# Altium PCB air_pod_case.PcbDoc
Units mm, origin at the board's own origin, x right, y up, seen from the top; angles counter-clockwise.
Board outline 166.05 x 139.83 mm, 2 copper layers (Top Layer, Bottom Layer); 9 components, 96 nets, 204 pads, 144 vias.
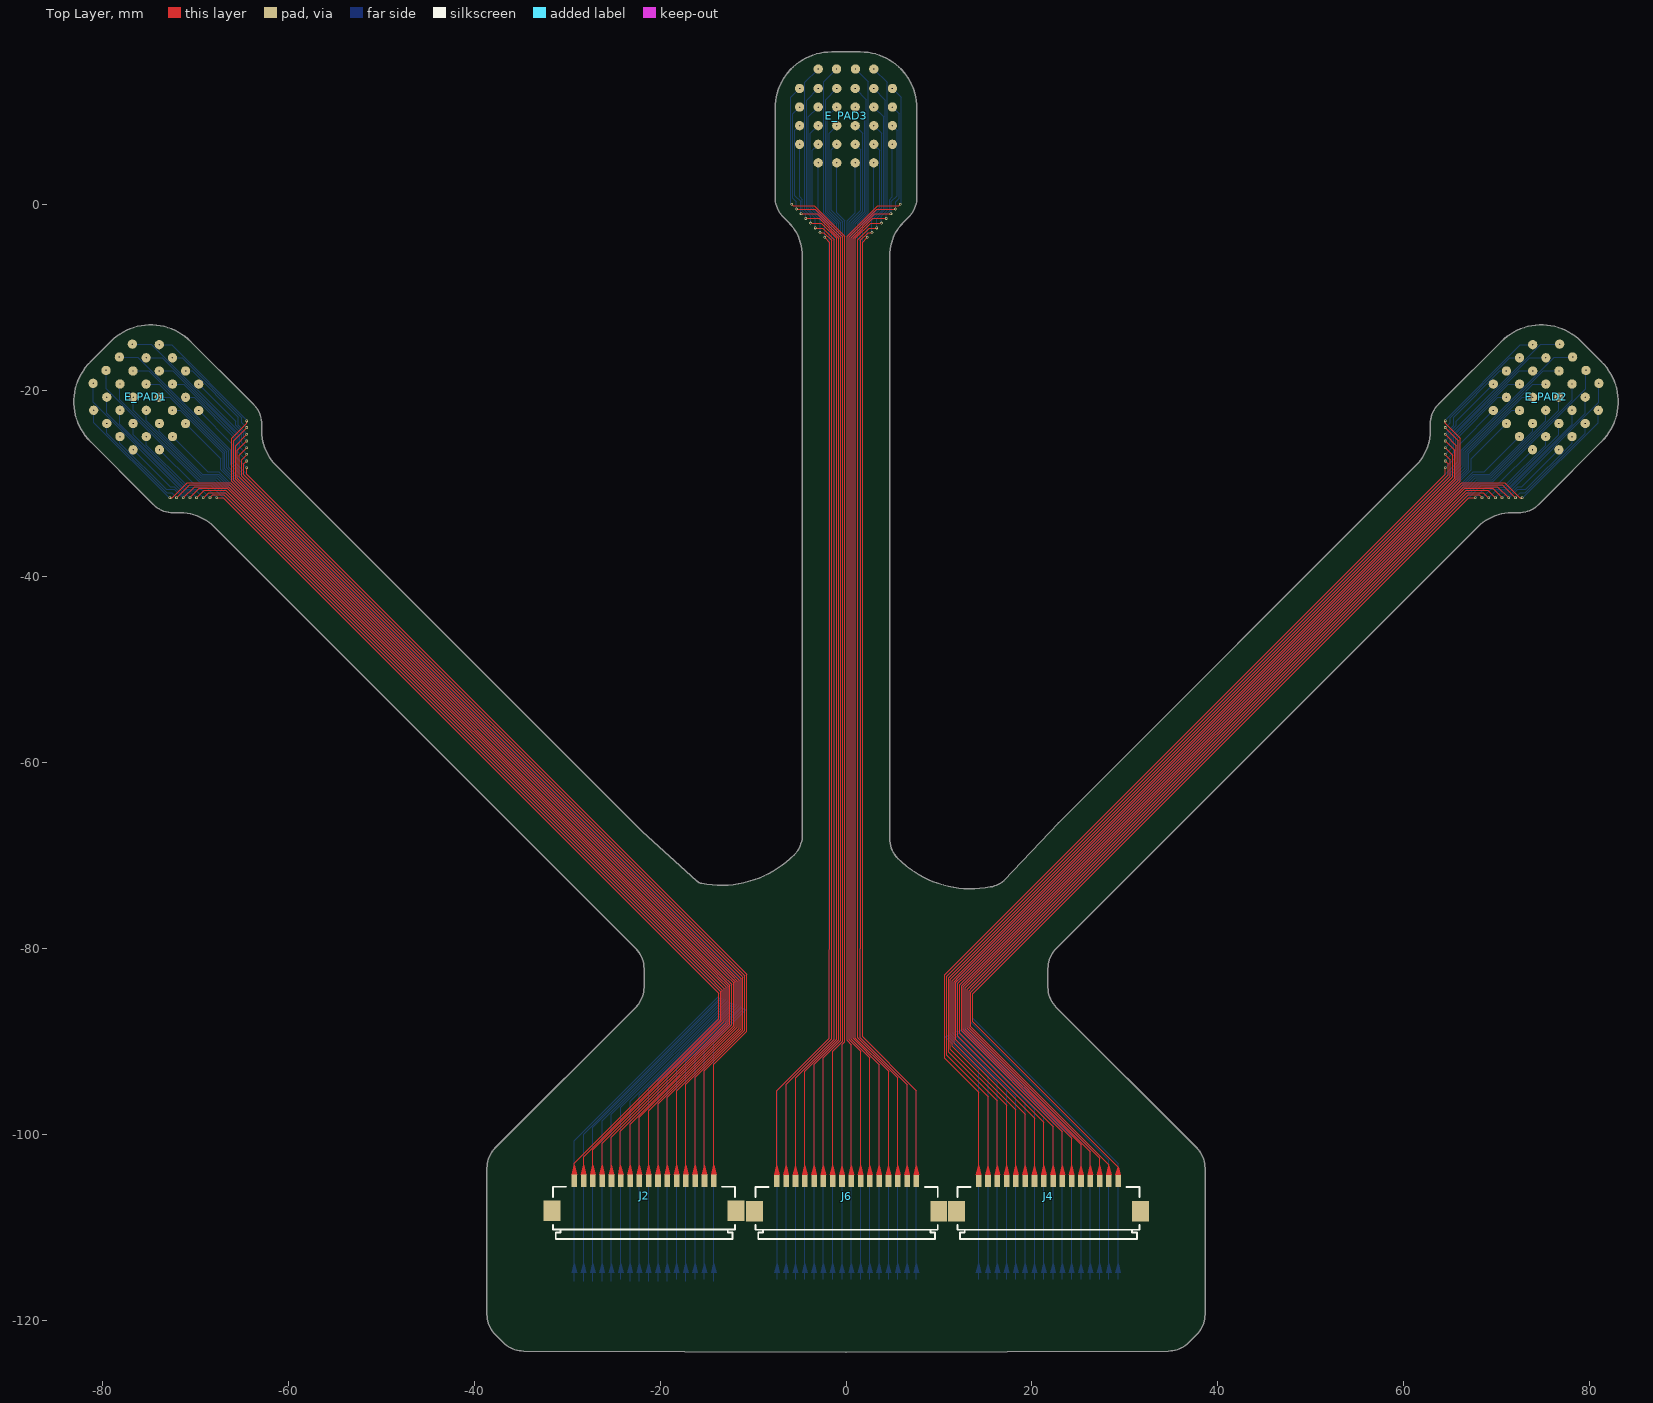
[diagram p0: Top Layer view]
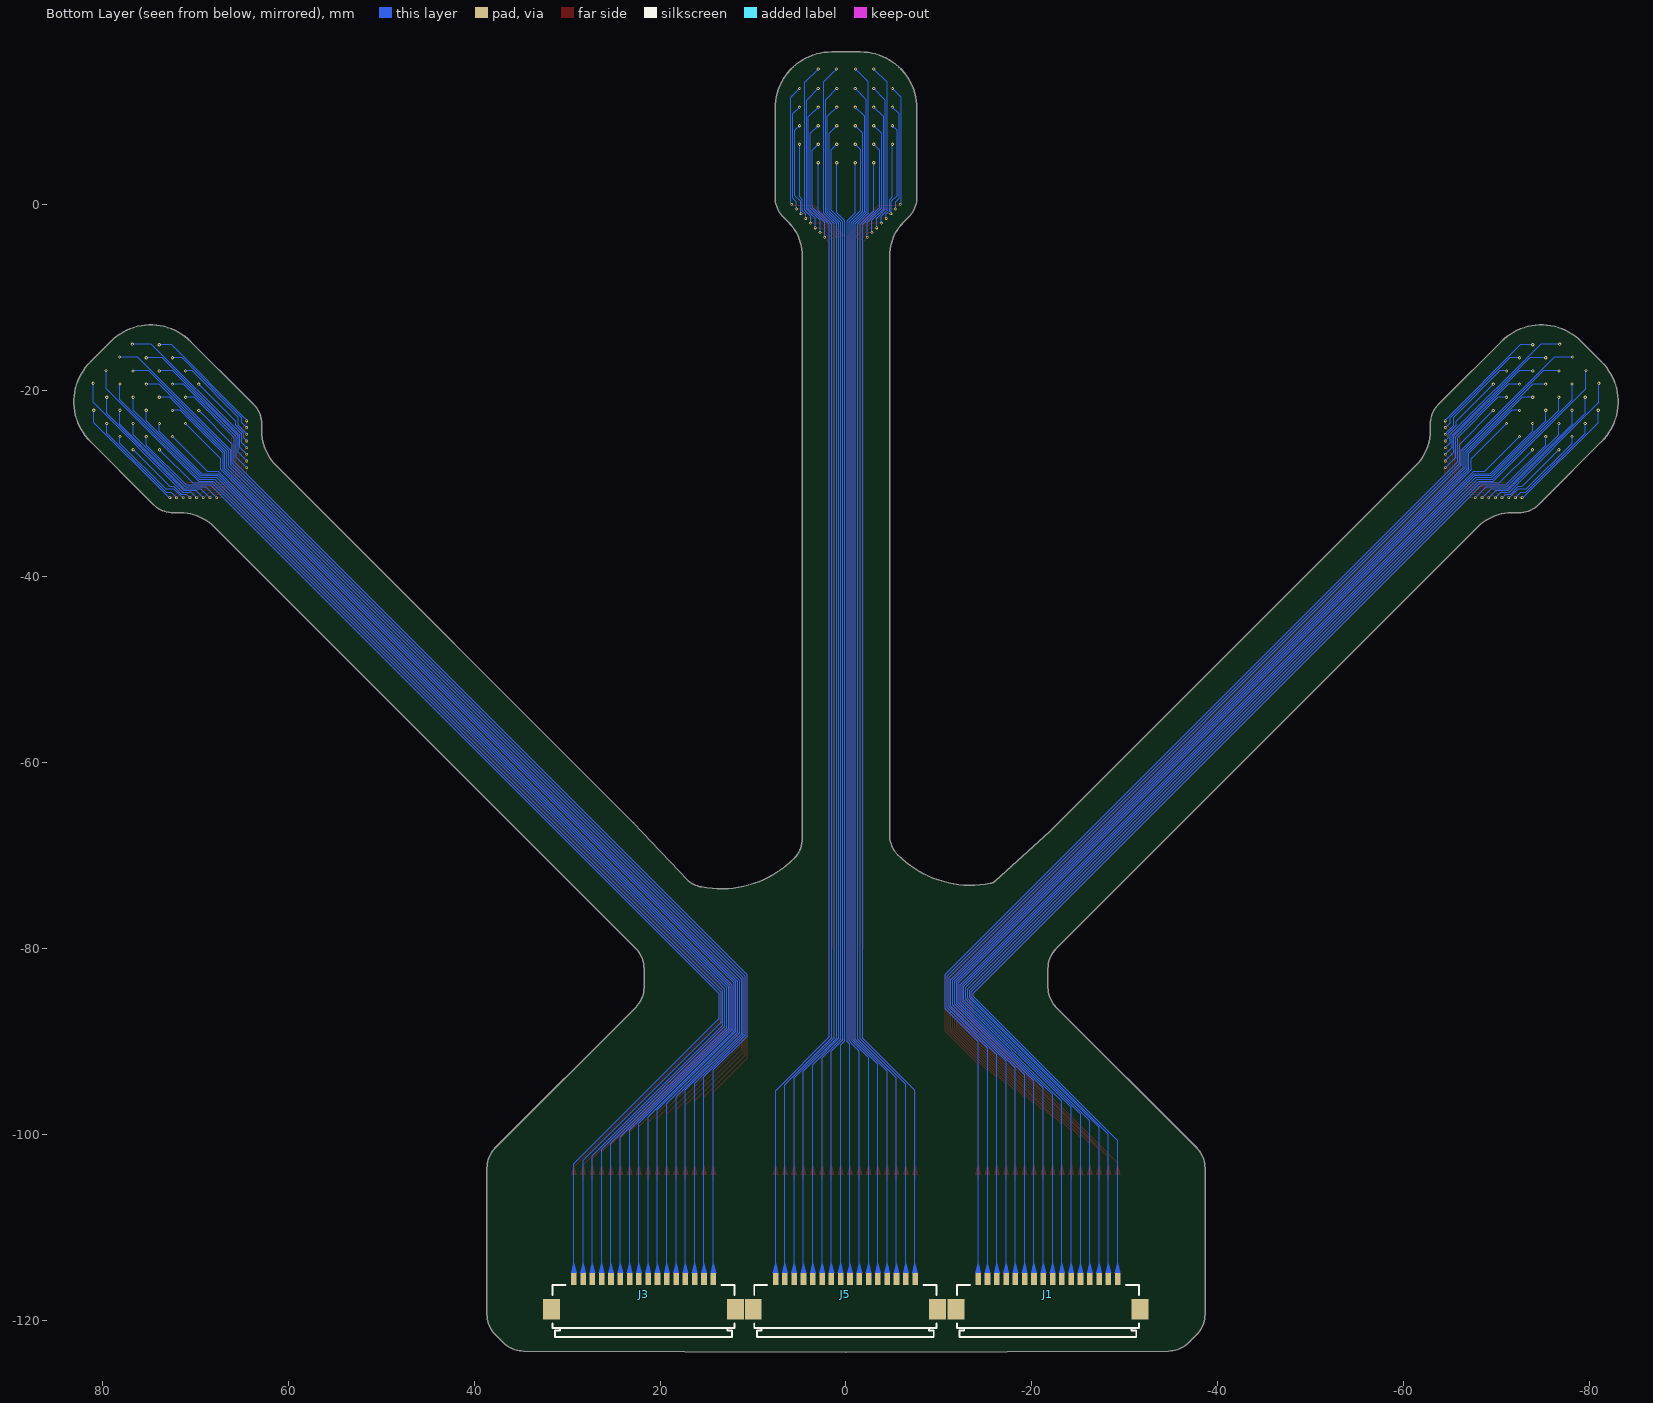
[diagram p1: Bottom Layer view, seen from below]
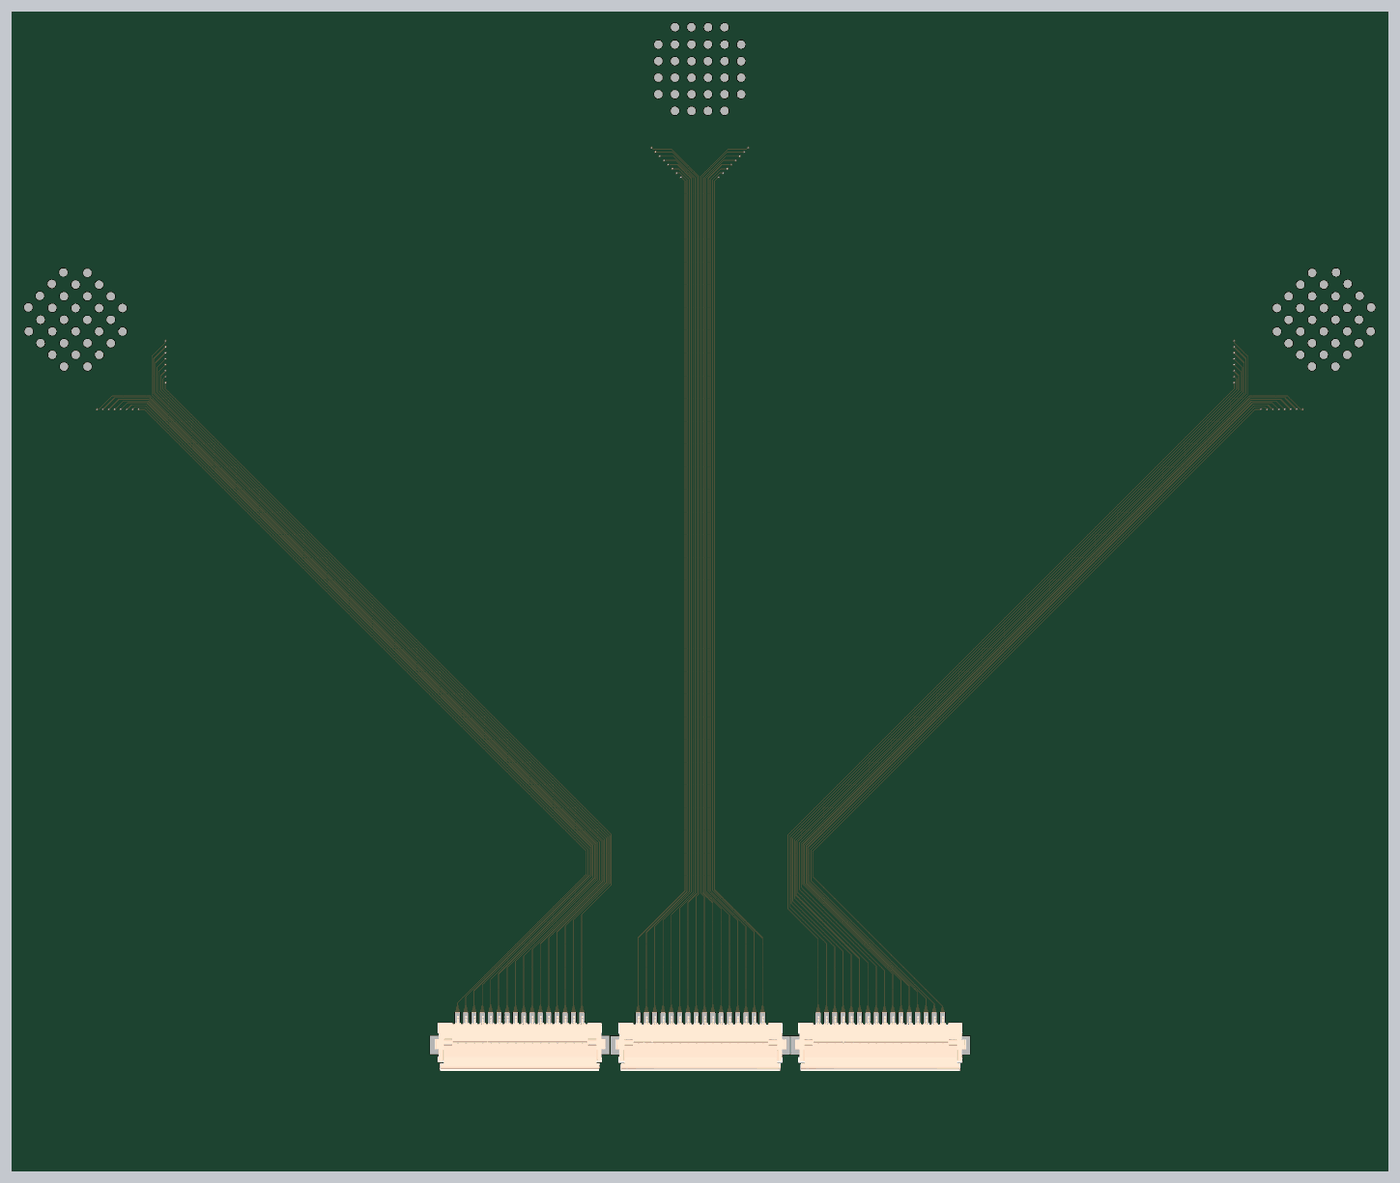
[diagram p2: 3D render of the assembled board from above, using the file's embedded part models]
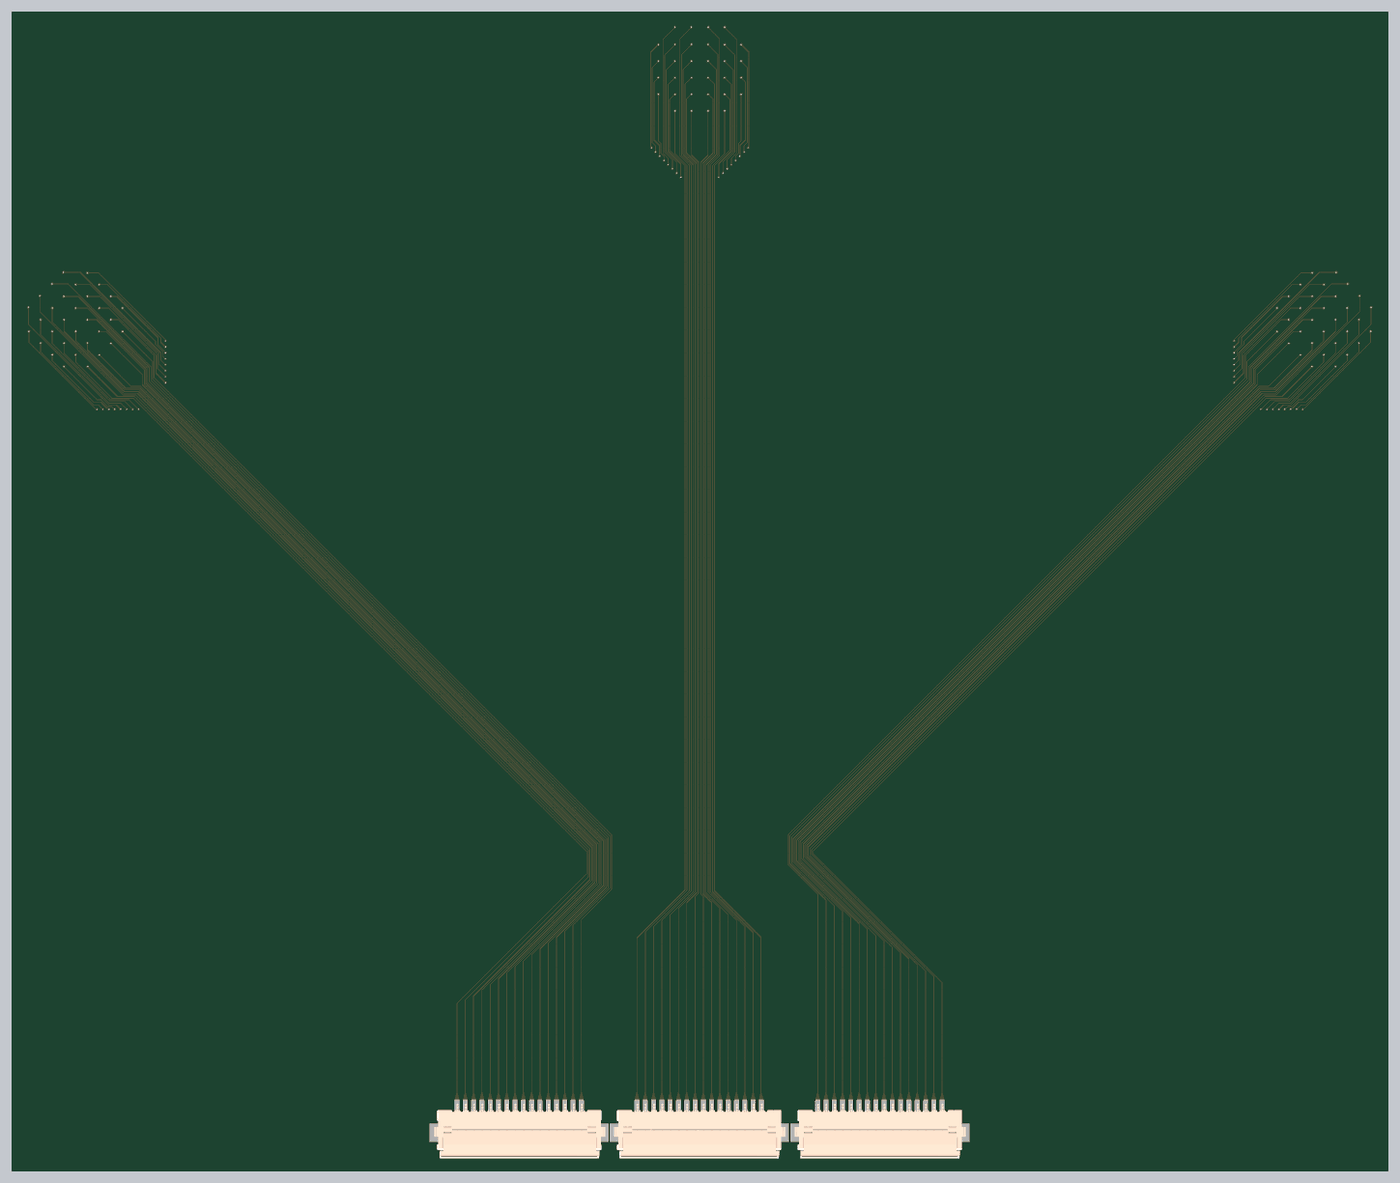
[diagram p3: 3D render of the assembled board from below, using the file's embedded part models]

## Layer stack, top to bottom
Top Solder: solder mask 0.0102, Solder Resist, Dk 3.5
Top Layer: signal copper 0.0356
Dielectric 1: dielectric 0.32, FR-4, Dk 4.8
Bottom Layer: signal copper 0.0356
Bottom Solder: solder mask 0.0102, Solder Resist, Dk 3.5

## Board outline
-38.608,-119.38 -38.608,-103.632 cw(c-35.542,-103.632) -37.71,-101.464 -22.615,-86.369 ccw(c-24.783,-84.201) -21.717,-84.201 -21.717,-82.186 ccw(c-24.783,-82.186) -22.615,-80.018 -24.964,-77.669 -67.963,-34.67 ccw(c-71.565,-38.272) -71.565,-33.178 -72.327,-33.178 cw(c-72.327,-30.112) -74.495,-32.28 -75.034,-31.742 -75.167,-31.608 -81.253,-25.523 cw(c-76.965,-21.235) -81.253,-16.947 -80.332,-16.026 -79.973,-15.667 -79.052,-14.746 cw(c-74.764,-19.034) -70.476,-14.746 -64.391,-20.832 -63.719,-21.504 cw(c-65.887,-23.672) -62.821,-23.672 -62.821,-24.434 ccw(c-57.727,-24.434) -61.329,-28.036 -21.886,-67.479 -16.06,-72.756 ccw(c-15.36,-72.06) -15.525,-73.034 -15.52,-73.034 ccw(c-13.441,-62.137) -5.597,-69.981 -5.589,-69.978 ccw(c-7.757,-67.81) -4.691,-67.81 -4.691,-62.738 -4.691,-5.547 ccw(c-9.785,-5.547) -6.183,-1.945 -6.722,-1.406 cw(c-4.554,0.762) -7.62,0.762 -7.62,10.319 cw(c-1.556,10.319) -1.556,16.383 1.556,16.383 cw(c1.556,10.319) 7.62,10.319 7.62,0.762 cw(c4.554,0.762) 6.722,-1.406 6.183,-1.945 ccw(c9.785,-5.547) 4.691,-5.547 4.691,-62.865 4.691,-67.429 4.691,-68.191 ccw(c7.757,-68.191) 5.589,-70.359 5.597,-70.362 ccw(c13.441,-62.518) 15.52,-73.415 ccw(c15.009,-70.392) 16.987,-72.734 22.838,-66.526 61.329,-28.036 ccw(c57.727,-24.434) 62.821,-24.434 62.821,-23.672 cw(c65.887,-23.672) 63.719,-21.504 64.257,-20.965 64.391,-20.832 70.476,-14.746 cw(c74.764,-19.034) 79.052,-14.746 79.973,-15.667 80.332,-16.026 81.253,-16.947 cw(c76.965,-21.235) 81.253,-25.523 75.167,-31.608 74.495,-32.28 cw(c72.327,-30.112) 72.327,-33.178 71.565,-33.178 ccw(c71.565,-38.272) 67.963,-34.67 25.218,-77.415 24.964,-77.669 22.615,-80.018 ccw(c24.783,-82.186) 21.717,-82.186 21.717,-84.201 ccw(c24.783,-84.201) 22.615,-86.369 37.71,-101.464 cw(c35.542,-103.632) 38.608,-103.632 38.608,-119.38 cw(c35.542,-119.38) 37.71,-121.548 36.839,-122.419 cw(c34.671,-120.251) 34.671,-123.317 0,-123.444 -34.671,-123.317 cw(c-34.671,-120.251) -36.839,-122.419 -37.71,-121.548 cw(c-35.542,-119.38)

## Design rules (kind name [scope] priority, off if disabled: settings)
Clearance [All] p1: gap=0.254 ignorepadtopadclearanceinfootprint=FALSE except(0.1: Arc-Arc Arc-Track Arc-SMDPad Arc-THPad Arc-Via Arc-Fill Arc-Poly Arc-Region Arc-Text Arc-Hole Track-Track Track-SMDPad Track-THPad Track-Via Track-Fill Track-Poly Track-Region Track-Text Track-Hole)
PolygonConnect [All] p1: connectstyle=Relief reliefconductorwidth=0.254 reliefentries=4 polygonreliefangle="90 Angle" airgapwidth=0.254
RoutingVias [All] p1: holewidth=0.711 width=1.27 viastyle="Through Hole" minholewidth=0.711 minwidth=1.27 maxholewidth=0.711 maxwidth=1.27
SolderMaskExpansion [All] p1: expansion=0.102 istentingtop=FALSE
Width [All] p1: maxlimit=0.1 minlimit=0.1 preferedwidth=0.1 minimp=50.000000 maximp=50.000000 favimp=50.000000
30 further rules are at their usual default settings.

## Components (designator, comment, footprint, x,y, rotation, side; value= is the part's Value field where it differs from the comment)
E_PAD1 "electrode_pads" 32_electrode_pads#1 -68.568,-27.431 r45 top
E_PAD2 "electrode_pads" 32_electrode_pads#2 68.568,-27.431 r315 top
E_PAD3 "electrode_pads" 32_electrode_pads#3 0,0 r0 top
J1 "FH12-16S-1SH(55)" FH12-16S-1SH(55) -21.844,-118.568 r0 bottom
J2 "FH12-16S-1SH(55)" FH12-16S-1SH(55) -21.59,-108 r180 top
J3 "FH12-16S-1SH(55)" FH12-16S-1SH(55) 21.645,-118.568 r0 bottom
J4 "FH12-16S-1SH(55)" FH12-16S-1SH(55) 21.899,-108.027 r180 top
J5 "FH12-16S-1SH(55)" FH12-16S-1SH(55) -0.056,-118.568 r0 bottom
J6 "FH12-16S-1SH(55)" FH12-16S-1SH(55) 0.198,-108.027 r180 top

## Footprints (in the part's own frame and the unit in brackets; to place one, negate y for a bottom-side part, rotate by r counter-clockwise, add the part's x,y. Pads: shape width x height; smd on the part's side, far side on the other; paste and mask are expansions set on the pad)
32_electrode_pads#1 [mm]
  round 1 smd: 1(-2.991,6.45) 2(-2.984,4.45) 3(-1.016,14.541) 4(-0.991,12.45) 5(-0.991,10.45) 6(-0.991,8.45) 7(-0.991,6.45) 8(-0.991,4.45) 9(0.991,4.45) 10(0.991,6.45) 11(0.991,8.45) 12(0.991,10.45) 13(0.991,12.45) 14(1.016,14.541) 15(2.984,4.45) 16(2.991,6.45) 17(-2.991,8.45) 18(-2.991,10.45) 19(-2.991,12.45) 20(-2.984,14.541) 21(-4.991,6.45) 22(-4.991,8.45) 23(-4.991,10.45) 24(-4.991,12.45) 25(4.991,12.45) 26(4.991,10.45) 27(4.991,8.45) 28(4.991,6.45) 29(2.984,14.541) 30(2.991,12.45) 31(2.991,10.45) 32(2.991,8.45)
  Top Layer lines w0.1: -5.842,0 -5.677,-0.165 -3.391,-0.165 -0.127,-3.429 -0.127,-78.39 ; -5.334,-0.508 -5.324,-0.518 -3.321,-0.518 -0.344,-3.495 -0.344,-78.12 ; -4.826,-1.016 -3.117,-1.016 -0.544,-3.59 -0.544,-77.941 ; -4.318,-1.524 -2.892,-1.524 -0.762,-3.654 -0.762,-77.671 ; -3.81,-2.032 -2.667,-2.032 -1.016,-3.683 -1.016,-77.402 ; -3.303,-2.541 -3.267,-2.578 -2.502,-2.578 -1.27,-3.81 -1.27,-77.133 ; -2.794,-3.048 -2.37,-3.048 -1.524,-3.894 -1.524,-76.863 ; -2.286,-3.556 -1.778,-4.064 -1.778,-76.594 ; 2.286,-3.556 1.778,-4.064 1.778,-80.082 ; 2.794,-3.048 2.37,-3.048 1.524,-3.894 1.524,-79.999 ; 3.81,-2.032 2.667,-2.032 1.016,-3.683 1.016,-79.467 ; 4.318,-1.524 2.892,-1.524 0.762,-3.654 0.762,-79.198 ; 4.826,-1.016 3.117,-1.016 0.544,-3.59 0.544,-79.018 ; 5.334,-0.508 5.324,-0.518 3.321,-0.518 0.344,-3.495 0.344,-78.839 ; 5.842,0 5.677,-0.165 3.391,-0.165 0.127,-3.429 0.127,-78.659 ; 3.303,-2.541 3.267,-2.578 2.502,-2.578 1.27,-3.81 1.27,-79.737
  Bottom Layer lines w0.1: -2.984,14.541 -4.433,13.092 -4.433,-0.645 -3.81,-1.268 -3.81,-2.032 ; -4.991,12.45 -5.921,11.52 -5.921,0.133 -5.842,0.054 -5.842,0 ; -1.016,14.541 -1.435,14.122 ; -4.991,10.45 -5.721,9.72 -5.721,0.641 -5.334,0.254 -5.334,-0.508 ; -2.991,12.45 -4.233,11.208 -4.233,-0.562 -3.302,-1.493 -3.302,-2.54 -3.303,-2.541 ; 1.016,14.541 1.435,14.122 ; -4.991,8.45 -5.504,7.937 -5.504,0.932 -4.883,0.311 -4.883,-0.761 -4.864,-0.779 -4.864,-0.978 -4.826,-1.016 ; -2.991,10.45 -4.033,9.408 -4.033,-0.479 -2.794,-1.718 -2.794,-3.04 ; -0.991,12.45 -2.194,11.247 -2.194,-0.904 -1.016,-2.082 -1.016,-79.467 ; 2.984,14.541 4.433,13.092 4.433,-0.645 3.81,-1.268 3.81,-2.032 ; 0.991,12.45 2.194,11.247 2.194,-0.904 0.962,-2.136 0.962,-80.023 0.962,-80.049 ; -4.991,6.45 -4.991,0.8 -4.683,0.492 -4.683,-0.678 -4.318,-1.043 -4.318,-1.524 ; -2.991,8.45 -3.833,7.608 -3.833,-0.396 -2.286,-1.943 -2.286,-3.556 ; -0.991,10.45 -1.994,9.447 -1.994,-0.821 -0.762,-2.053 -0.762,-79.467 ; 0.991,10.45 1.994,9.447 1.994,-0.821 0.762,-2.053 0.762,-79.944 ; 2.991,12.45 4.233,11.208 4.233,-0.562 3.302,-1.493 3.302,-2.54 3.303,-2.541 ; -2.991,6.45 -3.633,5.808 -3.633,-0.314 -1.778,-2.169 -1.778,-79.378 ; -0.991,8.45 -1.794,7.647 -1.794,-0.738 -0.547,-1.986 -0.547,-79.578 ; 0.991,8.45 1.794,7.647 1.794,-0.738 0.547,-1.986 0.547,-79.882 ; 2.991,10.45 4.033,9.408 4.033,-0.479 2.794,-1.718 2.794,-3.04 ; 4.991,12.45 5.921,11.52 5.921,0.133 5.842,0.054 5.842,0 ; -0.991,6.45 -1.594,5.847 -1.594,-0.655 -0.347,-1.903 ; -2.984,4.45 -2.984,-0.68 -1.524,-2.14 -1.524,-79.424 ; 0.991,6.45 1.594,5.847 1.594,-0.655 0.347,-1.903 0.347,-79.801 ; 2.991,8.45 3.833,7.608 3.833,-0.396 2.286,-1.943 2.286,-3.556 ; 4.991,10.45 5.721,9.72 5.721,0.641 5.334,0.254 5.334,-0.508 ; -0.991,4.45 -0.991,-0.914 -0.147,-1.758 -0.147,-79.737 ; 0.991,4.45 0.991,-0.914 0.147,-1.758 0.147,-79.733 ; 2.991,6.45 3.633,5.808 3.633,-0.314 1.778,-2.169 1.778,-80.082 ; 4.991,8.45 5.504,7.937 5.504,0.932 4.883,0.311 4.883,-0.761 4.864,-0.779 4.864,-0.978 4.826,-1.016 ; 2.984,4.45 2.984,-0.68 1.517,-2.146 1.517,-80.006 ; 4.991,6.45 4.991,0.8 4.683,0.492 4.683,-0.678 4.318,-1.043 4.318,-1.524 ; 1.27,-80.006 1.27,-2.111 2.394,-0.987 2.394,13.163 1.435,14.122 ; -1.435,14.122 -1.435,14.122 ; -1.435,14.122 -2.394,13.163 -2.394,-0.987 -1.27,-2.111 -1.27,-79.453 ; 1.435,14.122 1.435,14.122 ; -1.27,-79.453 -1.27,-79.453
32_electrode_pads#2 [mm]
  round 1 smd: 1(-2.991,6.45) 2(-2.984,4.45) 3(-1.016,14.541) 4(-0.991,12.45) 5(-0.991,10.45) 6(-0.991,8.45) 7(-0.991,6.45) 8(-0.991,4.45) 9(0.991,4.45) 10(0.991,6.45) 11(0.991,8.45) 12(0.991,10.45) 13(0.991,12.45) 14(1.016,14.541) 15(2.984,4.45) 16(2.991,6.45) 17(-2.991,8.45) 18(-2.991,10.45) 19(-2.991,12.45) 20(-2.984,14.541) 21(-4.991,6.45) 22(-4.991,8.45) 23(-4.991,10.45) 24(-4.991,12.45) 25(4.991,12.45) 26(4.991,10.45) 27(4.991,8.45) 28(4.991,6.45) 29(2.984,14.541) 30(2.991,12.45) 31(2.991,10.45) 32(2.991,8.45)
  Top Layer lines w0.1: -1.778,-79.378 -1.778,-4.064 -2.286,-3.556 ; -1.524,-79.626 -1.524,-3.894 -2.37,-3.048 -2.794,-3.048 ; -1.27,-79.467 -1.27,-3.81 -2.502,-2.578 -3.267,-2.578 -3.303,-2.541 ; -1.016,-79.47 -1.016,-3.683 -2.667,-2.032 -3.81,-2.032 ; -0.762,-79.357 -0.762,-3.654 -2.892,-1.524 -4.318,-1.524 ; -0.544,-79.177 -0.544,-3.59 -3.117,-1.016 -4.826,-1.016 ; -0.344,-78.92 -0.344,-3.495 -3.321,-0.518 -5.324,-0.518 -5.334,-0.508 ; 0.127,-79.267 0.127,-3.429 3.391,-0.165 5.677,-0.165 5.842,0 ; -0.127,-78.818 -0.127,-3.429 -3.391,-0.165 -5.677,-0.165 -5.842,0 ; 0.762,-79.198 0.762,-3.654 2.892,-1.524 4.318,-1.524 ; 0.344,-78.749 0.344,-3.495 3.321,-0.518 5.324,-0.518 5.334,-0.508 ; 0.544,-78.818 0.544,-3.59 3.117,-1.016 4.826,-1.016 ; 1.016,-79.198 1.016,-3.683 2.667,-2.032 3.81,-2.032 ; 1.27,-79.108 1.27,-3.81 2.502,-2.578 3.267,-2.578 3.303,-2.541 ; 1.524,-79.018 1.524,-3.894 2.37,-3.048 2.794,-3.048 ; 1.778,-78.929 1.778,-4.064 2.286,-3.556
  Bottom Layer lines w0.1: -1.765,-80.169 -1.778,-80.156 -1.778,-2.169 -3.633,-0.314 -3.633,5.808 -2.991,6.45 ; -1.524,-80.082 -1.524,-2.14 -2.984,-0.68 -2.984,4.45 ; -1.27,-79.177 -1.27,-2.111 -2.394,-0.987 -2.394,13.163 -1.435,14.122 ; -1.016,-78.891 -1.016,-2.082 -2.194,-0.904 -2.194,11.247 -0.991,12.45 ; -0.762,-78.839 -0.762,-2.053 -1.994,-0.821 -1.994,9.447 -0.991,10.45 ; -0.547,-78.463 -0.547,-1.986 -1.794,-0.738 -1.794,7.647 -0.991,8.45 ; -0.347,-78.659 -0.347,-1.903 -1.594,-0.655 -1.594,5.847 -0.991,6.45 ; -0.147,-78.688 -0.147,-1.758 -0.991,-0.914 -0.991,4.45 ; 0.147,-78.659 0.147,-1.758 0.991,-0.914 0.991,4.45 ; 0.347,-78.556 0.347,-1.903 1.594,-0.655 1.594,5.847 0.991,6.45 ; 0.547,-78.308 0.547,-1.986 1.794,-0.738 1.794,7.647 0.991,8.45 ; 0.762,-78.398 0.762,-2.053 1.994,-0.821 1.994,9.447 0.991,10.45 ; 1.016,-78.308 1.016,-2.082 2.194,-0.904 2.194,11.247 0.991,12.45 ; 1.27,-78.308 1.27,-2.111 2.394,-0.987 2.394,13.163 1.435,14.122 ; 1.524,-78.038 1.524,-2.14 2.984,-0.68 2.984,4.45 ; -3.303,-2.541 -3.302,-2.54 -3.302,-1.493 -4.233,-0.562 -4.233,11.208 -2.991,12.45 ; -2.286,-3.556 -2.286,-1.943 -3.833,-0.396 -3.833,7.608 -2.991,8.45 ; -3.81,-2.032 -3.81,-1.268 -4.433,-0.645 -4.433,13.092 -2.984,14.541 ; -4.318,-1.524 -4.318,-1.043 -4.683,-0.678 -4.683,0.492 -4.991,0.8 -4.991,6.45 ; -4.826,-1.016 -4.864,-0.978 -4.864,-0.779 -4.883,-0.761 -4.883,0.311 -5.504,0.932 -5.504,7.937 -4.991,8.45 ; -5.334,-0.508 -5.334,0.254 -5.721,0.641 -5.721,9.72 -4.991,10.45 ; -5.842,0 -5.842,0.054 -5.921,0.133 -5.921,11.52 -4.991,12.45 ; -2.794,-3.04 -2.794,-1.718 -4.033,-0.479 -4.033,9.408 -2.991,10.45 ; 2.286,-3.556 2.286,-1.943 3.833,-0.396 3.833,7.608 2.991,8.45 ; 2.794,-3.04 2.794,-1.718 4.033,-0.479 4.033,9.408 2.991,10.45 ; 3.303,-2.541 3.302,-2.54 3.302,-1.493 4.233,-0.562 4.233,11.208 2.991,12.45 ; 3.81,-2.032 3.81,-1.268 4.433,-0.645 4.433,13.092 2.984,14.541 ; 4.318,-1.524 4.318,-1.043 4.683,-0.678 4.683,0.492 4.991,0.8 4.991,6.45 ; 3.633,-0.314 3.633,5.808 2.991,6.45 ; 4.826,-1.016 4.864,-0.978 4.864,-0.779 4.883,-0.761 4.883,0.311 5.504,0.932 5.504,7.937 4.991,8.45 ; 5.334,-0.508 5.334,0.254 5.721,0.641 5.721,9.72 4.991,10.45 ; 5.842,0 5.842,0.054 5.921,0.133 5.921,11.52 4.991,12.45 ; -1.016,14.541 -1.435,14.122 ; 1.016,14.541 1.435,14.122 ; -1.435,14.122 -1.435,14.122 ; 1.435,14.122 1.435,14.122
32_electrode_pads#3 [mm]
  round 1 smd: 1(-2.991,6.45) 2(-2.984,4.45) 3(-1.016,14.541) 4(-0.991,12.45) 5(-0.991,10.45) 6(-0.991,8.45) 7(-0.991,6.45) 8(-0.991,4.45) 9(0.991,4.45) 10(0.991,6.45) 11(0.991,8.45) 12(0.991,10.45) 13(0.991,12.45) 14(1.016,14.541) 15(2.984,4.45) 16(2.991,6.45) 17(-2.991,8.45) 18(-2.991,10.45) 19(-2.991,12.45) 20(-2.984,14.541) 21(-4.991,6.45) 22(-4.991,8.45) 23(-4.991,10.45) 24(-4.991,12.45) 25(4.991,12.45) 26(4.991,10.45) 27(4.991,8.45) 28(4.991,6.45) 29(2.984,14.541) 30(2.991,12.45) 31(2.991,10.45) 32(2.991,8.45)
  Top Layer lines w0.1: -5.842,0 -5.677,-0.165 -3.391,-0.165 -0.127,-3.429 -0.127,-80.082 ; -5.334,-0.508 -5.324,-0.518 -3.321,-0.518 -0.344,-3.495 -0.344,-80.082 ; -4.826,-1.016 -3.117,-1.016 -0.544,-3.59 -0.544,-80.082 ; -4.318,-1.524 -2.892,-1.524 -0.762,-3.654 -0.762,-80.082 ; -3.81,-2.032 -2.667,-2.032 -1.016,-3.683 -1.016,-80.082 ; -3.303,-2.541 -3.267,-2.578 -2.502,-2.578 -1.27,-3.81 -1.27,-80.082 ; -2.794,-3.048 -2.37,-3.048 -1.524,-3.894 -1.524,-80.082 ; -2.286,-3.556 -1.778,-4.064 -1.778,-80.137 ; 0.127,-80.082 0.127,-3.429 3.391,-0.165 5.677,-0.165 5.842,0 ; 0.344,-80.082 0.344,-3.495 3.321,-0.518 5.324,-0.518 5.334,-0.508 ; 0.544,-80.082 0.544,-3.59 3.117,-1.016 4.826,-1.016 ; 0.762,-80.082 0.762,-3.654 2.892,-1.524 4.318,-1.524 ; 1.016,-80.082 1.016,-3.683 2.667,-2.032 3.81,-2.032 ; 1.27,-80.137 1.27,-3.81 2.502,-2.578 3.267,-2.578 3.303,-2.541 ; 1.524,-80.082 1.524,-3.894 2.37,-3.048 2.794,-3.048 ; 1.778,-80.082 1.778,-4.064 2.286,-3.556
  Bottom Layer lines w0.1: -5.842,0 -5.842,0.054 -5.921,0.133 -5.921,11.52 -4.991,12.45 ; -5.334,-0.508 -5.334,0.254 -5.721,0.641 -5.721,9.72 -4.991,10.45 ; -4.991,6.45 -4.991,0.8 -4.683,0.492 -4.683,-0.678 -4.318,-1.043 -4.318,-1.524 ; -4.991,8.45 -5.504,7.937 -5.504,0.932 -4.883,0.311 -4.883,-0.761 -4.864,-0.779 -4.864,-0.978 -4.826,-1.016 ; -3.81,-2.032 -3.81,-1.268 -4.433,-0.645 -4.433,13.092 -2.984,14.541 ; -3.303,-2.541 -3.302,-2.54 -3.302,-1.493 -4.233,-0.562 -4.233,11.208 -2.991,12.45 ; -2.991,6.45 -3.633,5.808 -3.633,-0.314 -1.778,-2.169 -1.778,-80.128 -1.778,-80.169 ; -2.991,8.45 -3.833,7.608 -3.833,-0.396 -2.286,-1.943 -2.286,-3.556 ; -2.991,10.45 -4.033,9.408 -4.033,-0.479 -2.794,-1.718 -2.794,-3.04 ; -2.984,4.45 -2.984,-0.68 -1.524,-2.14 -1.524,-80.082 ; -1.27,-80.082 -1.27,-80.069 -1.27,-2.111 -2.394,-0.987 -2.394,13.163 -1.435,14.122 ; -1.016,-80.082 -1.016,-2.082 -2.194,-0.904 -2.194,11.247 -0.991,12.45 ; -1.016,14.541 -1.435,14.122 ; -0.991,4.45 -0.991,-0.914 -0.147,-1.758 ; -0.991,6.45 -1.594,5.847 -1.594,-0.655 -0.347,-1.903 -0.347,-80.082 ; -0.991,8.45 -1.794,7.647 -1.794,-0.738 -0.547,-1.986 -0.547,-80.082 ; -0.991,10.45 -1.994,9.447 -1.994,-0.821 -0.762,-2.053 -0.762,-80.01 ; 0.147,-80.082 0.147,-1.758 0.991,-0.914 0.991,4.45 ; 0.347,-80.082 0.347,-1.903 1.594,-0.655 1.594,5.847 0.991,6.45 ; 0.547,-80.082 0.547,-1.986 1.794,-0.738 1.794,7.647 0.991,8.45 ; 0.762,-80.01 0.762,-2.053 1.994,-0.821 1.994,9.447 0.991,10.45 ; 0.991,12.45 2.194,11.247 2.194,-0.904 1.016,-2.082 1.016,-80.082 ; 1.016,14.541 1.435,14.122 ; 1.27,-80.082 1.27,-2.111 2.394,-0.987 2.394,13.163 1.435,14.122 ; 1.524,-80.082 1.524,-2.14 2.984,-0.68 2.984,4.45 ; 1.778,-80.082 1.778,-2.169 3.633,-0.314 3.633,5.808 2.991,6.45 ; 2.286,-3.556 2.286,-1.943 3.833,-0.396 3.833,7.608 2.991,8.45 ; 2.794,-3.04 2.794,-1.718 4.033,-0.479 4.033,9.408 2.991,10.45 ; 2.984,14.541 4.433,13.092 4.433,-0.645 3.81,-1.268 3.81,-2.032 ; 2.991,12.45 4.233,11.208 4.233,-0.562 3.302,-1.493 3.302,-2.54 3.303,-2.541 ; 4.318,-1.524 4.318,-1.043 4.683,-0.678 4.683,0.492 4.991,0.8 4.991,6.45 ; 4.826,-1.016 4.864,-0.978 4.864,-0.779 4.883,-0.761 4.883,0.311 5.504,0.932 5.504,7.937 4.991,8.45 ; 4.991,10.45 5.721,9.72 5.721,0.641 5.334,0.254 5.334,-0.508 ; 4.991,12.45 5.921,11.52 5.921,0.133 5.842,0.054 5.842,0 ; -1.435,14.122 -1.435,14.122 ; 1.435,14.122 1.435,14.122
FH12-16S-1SH(55) [mm] "FH12-16S-1SH(55)"
  rect 0.6x1.3 smd: 1(7.627,-2.998) 2(6.627,-2.998) 3(5.627,-2.998) 4(4.627,-2.998) 5(3.627,-2.998) 6(2.627,-2.998) 7(1.627,-2.998) 8(0.627,-2.998) 9(-0.373,-2.998) 10(-1.373,-2.998) 11(-2.373,-2.998) 12(-3.373,-2.998) 13(-4.373,-2.998) 14(-5.373,-2.998) 15(-6.373,-2.998) 16(-7.373,-2.998)
  rect 1.8x2.2 smd: 17(10.027,0.252) 18(-9.773,0.252)
  silkscreen extent -9.67,-2.35 9.93,3.25, body extent -10.23,-3.25 10.37,3.15, height 2.04

## Via types
v1: diameter 0.35, hole 0.15, Top Layer to Bottom Layer, tented bottom, 96 vias
v2: diameter 0.3, hole 0.15, Top Layer to Bottom Layer, tented both sides, 48 vias

## Nets (pads, with @x,y where several pads share a name; then routed paths per layer and width w, separated by ;. In a path a pad name is that pad's centre, name@x,y a point inside that pad or via, vN(x,y) a via of type N, cw(c..) or ccw(c..) an arc to the next point about the centre after c; other vN are vias at no path point)
NetE_PAD1_1: E_PAD1.1 J1.16 | length 37.4
  Bottom Layer w0.1: J1.16@-29.217,-115.824 J1.16 -29.217,-100.702 -13.684,-85.169 -13.684,-84.829
  other v1: -75.244,-24.985
NetE_PAD1_2: E_PAD1.2 J1.15 | length 37.3
  Bottom Layer w0.1: J1.15@-28.217,-115.824 J1.15 -28.217,-99.985 -13.484,-85.252 -13.484,-84.67
  other v1: -73.825,-26.394
NetE_PAD1_3: E_PAD1.3 J1.14 | length 37.1
  Bottom Layer w0.1: J1.14@-27.217,-115.824 -27.217,-99.267 -13.284,-85.335 -13.284,-84.511
  other v1: -79.568,-17.867
NetE_PAD1_4: E_PAD1.4 J1.13 | length 36.9
  Bottom Layer w0.1: J1.13@-26.217,-115.824 J1.13 -26.217,-98.55 -13.084,-85.417 -13.084,-84.352
  other v1: -78.072,-19.328
NetE_PAD1_5: E_PAD1.5 J1.12 | length 36.7
  Bottom Layer w0.1: J1.12@-25.217,-115.824 J1.12 -25.217,-97.833 -12.884,-85.5 -12.884,-84.192
  other v1: -76.658,-20.742
NetE_PAD1_6: E_PAD1.6 J1.11 | length 36.3
  Bottom Layer w0.1: J1.11 -24.217,-97.116 -12.684,-85.583 -12.684,-84.088
  other v1: -75.244,-22.157
NetE_PAD1_7: E_PAD1.7 J1.10 | length 114
  Bottom Layer w0.1: -67.468,-29.022 -12.484,-84.005 -12.484,-85.717 -23.217,-96.45 J1.10 J1.10@-23.217,-115.824
  other v1: -73.83,-23.571
NetE_PAD1_8: E_PAD1.8 J1.9 | length 36
  Bottom Layer w0.1: J1.9@-22.217,-115.824 J1.9 -22.217,-95.733 -12.284,-85.8 -12.284,-83.894
  other v1: -72.415,-24.985
NetE_PAD1_9: E_PAD1.9 J1.8 | length 35.9
  Bottom Layer w0.1: J1.8@-21.217,-115.824 J1.8 -21.217,-95.016 -12.084,-85.883 -12.084,-83.707
  other v1: -71.014,-23.584
NetE_PAD1_10: E_PAD1.10 J1.7 | length 35.6
  Bottom Layer w0.1: J1.7@-20.193,-115.824 -20.193,-94.274 -11.884,-85.966 -11.884,-83.629
  other v1: -72.428,-22.169
NetE_PAD1_11: E_PAD1.11 J1.6 | length 35.4
  Bottom Layer w0.1: J1.6@-19.217,-115.824 J1.6 -19.217,-93.581 -11.684,-86.049 -11.684,-83.546
  other v1: -73.842,-20.755
NetE_PAD1_12: E_PAD1.12 J1.5 | length 34.9
  Bottom Layer w0.1: J1.5 -18.217,-92.864 -11.484,-86.131 -11.484,-83.437
  other v1: -75.257,-19.341
NetE_PAD1_13: E_PAD1.13 J1.4 | length 35
  Bottom Layer w0.1: J1.4@-17.217,-115.824 J1.4 -17.217,-92.147 -11.284,-86.214 -11.284,-83.354 -11.303,-83.336
  other v1: -76.671,-17.927
NetE_PAD1_14: E_PAD1.14 J1.3 | length 34.6
  Bottom Layer w0.1: J1.3 -16.217,-91.43 -11.084,-86.297 -11.084,-83.119
  other v1: -78.132,-16.431
NetE_PAD1_15: E_PAD1.15 J1.2 | length 34.4
  Bottom Layer w0.1: J1.2 -15.217,-90.753 -10.884,-86.42 -10.884,-82.969 -10.922,-82.931
  other v1: -69.605,-22.174
NetE_PAD1_16: E_PAD1.16 J1.1 | length 34.5
  Bottom Layer w0.1: J1.1@-14.224,-115.824 -14.224,-90.043 -10.684,-86.503 -10.684,-82.8
  other v1: -71.014,-20.755
NetE_PAD1_17: E_PAD1.17 J2.1 | length 29.4
  Top Layer w0.1: J2.1 -29.217,-103.131 -13.684,-87.598 -13.684,-84.829 -15.665,-82.848
  other v1: -76.658,-23.571
  other v2: -67.67,-31.562
NetE_PAD1_18: E_PAD1.18 J2.2 | length 29
  Top Layer w0.1: J2.2 -28.217,-102.414 -13.484,-87.681 -13.484,-84.67 -15.295,-82.859
  other v1: -78.072,-22.157
  other v2: -68.388,-31.562
NetE_PAD1_19: E_PAD1.19 J2.3 | length 28.6
  Top Layer w0.1: J2.3 -27.217,-101.697 -13.284,-87.764 -13.284,-84.511 -14.925,-82.87
  other v1: -79.486,-20.742
  other v2: -69.107,-31.564
NetE_PAD1_20: E_PAD1.20 J2.4 | length 28.2
  Top Layer w0.1: J2.4 -26.217,-100.98 -13.084,-87.847 -13.084,-84.352 -14.555,-82.881
  other v1: -80.96,-19.259
  other v2: -69.825,-31.562
NetE_PAD1_21: E_PAD1.21 J2.5 | length 27.8
  Top Layer w0.1: J2.5 -25.217,-100.338 -12.884,-88.005 -12.884,-84.192 -14.185,-82.892
  other v1: -76.658,-26.399
  other v2: -70.544,-31.562
NetE_PAD1_22: E_PAD1.22 J2.6 | length 27.4
  Top Layer w0.1: J2.6 -24.257,-104.962 -24.257,-99.661 -12.684,-88.088 -12.684,-84.084 -13.772,-82.996 -13.84,-82.928
  other v1: -78.072,-24.985
  other v2: -71.262,-31.562
NetE_PAD1_23: E_PAD1.23 J2.7 | length 27
  Top Layer w0.1: J2.7 -23.217,-98.903 -12.484,-88.171 -12.484,-84.001 -13.572,-82.914
  other v1: -79.486,-23.571
  other v2: -71.98,-31.562
NetE_PAD1_24: E_PAD1.24 J2.8 | length 26.6
  Top Layer w0.1: J2.8 -22.217,-98.186 -12.284,-88.254 -12.284,-83.894 -13.228,-82.951
  other v1: -80.901,-22.157
  other v2: -72.699,-31.562
NetE_PAD1_25: E_PAD1.25 J2.9 | length 26.1
  Top Layer w0.1: J2.9 -21.217,-97.469 -12.084,-88.336 -12.084,-83.735 -12.858,-82.962
  other v1: -73.842,-15.098
  other v2: -64.437,-23.3
NetE_PAD1_26: E_PAD1.26 J2.10 | length 25.8
  Top Layer w0.1: J2.10 -20.193,-104.978 -20.193,-96.728 -11.884,-88.419 -11.884,-83.629 -12.509,-83.004 -12.577,-82.935
  other v1: -72.428,-16.513
  other v2: -64.437,-24.019
NetE_PAD1_27: E_PAD1.27 J2.11 | length 25.5
  Top Layer w0.1: J2.11 -19.217,-96.035 -11.684,-88.502 -11.684,-83.546 -12.309,-82.921
  other v1: -71.014,-17.927
  other v2: -64.437,-24.737
NetE_PAD1_28: E_PAD1.28 J2.12 | length 25.1
  Top Layer w0.1: J2.12 -18.217,-95.318 -11.484,-88.585 -11.484,-83.437 -12.028,-82.894
  other v1: -69.6,-19.341
  other v2: -64.437,-25.455
NetE_PAD1_29: E_PAD1.29 J2.13 | length 24.7
  Top Layer w0.1: J2.13 -17.217,-94.6 -11.284,-88.668 -11.284,-83.278 -11.658,-82.905
  other v1: -76.74,-15.039
  other v2: -64.437,-26.174
NetE_PAD1_30: E_PAD1.30 J2.14 | length 24.3
  Top Layer w0.1: J2.14 -16.217,-93.883 -11.084,-88.751 -11.084,-83.119 -11.287,-82.915
  other v1: -75.257,-16.513
  other v2: -64.435,-26.892
NetE_PAD1_31: E_PAD1.31 J2.15 | length 23.9
  Top Layer w0.1: J2.15 -15.217,-93.166 -10.884,-88.833 -10.884,-82.959 -10.922,-82.921
  other v1: -73.842,-17.927
  other v2: -64.437,-27.611
NetE_PAD1_32: E_PAD1.32 J2.16 | length 23.7
  Top Layer w0.1: J2.16 -14.224,-104.995 -14.224,-92.456 -10.684,-88.916 -10.684,-82.8
  other v1: -72.428,-19.341
  other v2: -64.437,-28.329
NetE_PAD2_1: E_PAD2.1 J3.16 | length 34.2
  Bottom Layer w0.1: 10.632,-82.871 10.632,-89.444 14.272,-93.084 J3.16
  other v1: 71.014,-20.755
NetE_PAD2_2: E_PAD2.2 J3.15 | length 34.4
  Bottom Layer w0.1: 10.864,-82.98 10.832,-83.012 10.832,-89.361 15.272,-93.801 J3.15
  other v1: 69.605,-22.174
NetE_PAD2_3: E_PAD2.3 J3.14 | length 35.5
  Bottom Layer w0.1: 11.683,-82.52 11.032,-83.171 11.032,-89.278 16.272,-94.518 J3.14
  other v1: 78.132,-16.431
NetE_PAD2_4: E_PAD2.4 J3.13 | length 35.9
  Bottom Layer w0.1: 12.065,-82.497 11.232,-83.33 11.232,-89.195 17.272,-95.235 J3.13
  other v1: 76.671,-17.927
NetE_PAD2_5: E_PAD2.5 J3.12 | length 36.1
  Bottom Layer w0.1: 12.282,-82.64 11.432,-83.489 11.432,-89.112 18.272,-95.952 J3.12
  other v1: 75.257,-19.341
NetE_PAD2_6: E_PAD2.6 J3.11 | length 36.7
  Bottom Layer w0.1: 12.7,-82.526 11.632,-83.594 11.632,-89.029 19.272,-96.669 J3.11
  other v1: 73.842,-20.755
NetE_PAD2_7: E_PAD2.7 J3.10 | length 36.6
  Bottom Layer w0.1: 12.702,-82.806 11.832,-83.677 11.832,-88.946 20.272,-97.387 J3.10
  other v1: 72.428,-22.169
NetE_PAD2_8: E_PAD2.8 J3.9 | length 36.8
  Bottom Layer w0.1: 12.824,-82.968 12.032,-83.76 12.032,-88.864 21.272,-98.104 J3.9
  other v1: 71.014,-23.584
NetE_PAD2_9: E_PAD2.9 J3.8 | length 36.9
  Bottom Layer w0.1: 13.051,-83.155 12.232,-83.974 12.232,-88.781 22.272,-98.821 J3.8
  other v1: 72.415,-24.985
NetE_PAD2_10: E_PAD2.10 J3.7 | length 37.2
  Bottom Layer w0.1: 13.266,-83.224 12.432,-84.057 12.432,-88.698 23.272,-99.538 J3.7
  other v1: 73.83,-23.571
NetE_PAD2_11: E_PAD2.11 J3.6 | length 37.6
  Bottom Layer w0.1: 13.583,-83.19 12.632,-84.14 12.632,-88.615 24.272,-100.255 J3.6
  other v1: 75.244,-22.157
NetE_PAD2_12: E_PAD2.12 J3.5 | length 37.7
  Bottom Layer w0.1: 13.671,-83.405 12.832,-84.245 12.832,-88.532 25.272,-100.972 J3.5
  other v1: 76.658,-20.742
NetE_PAD2_13: E_PAD2.13 J3.4 | length 37.9
  Bottom Layer w0.1: 13.914,-83.521 13.032,-84.404 13.032,-88.374 26.272,-101.614 J3.4
  other v1: 78.072,-19.328
NetE_PAD2_14: E_PAD2.14 J3.3 | length 38
  Bottom Layer w0.1: 14.094,-83.701 13.232,-84.563 13.232,-88.291 27.272,-102.331 J3.3
  other v1: 79.568,-17.867
NetE_PAD2_15: E_PAD2.15 J3.2 | length 38.5
  Bottom Layer w0.1: 14.464,-83.69 13.432,-84.722 13.432,-87.981 28.272,-102.821 J3.2
  other v1: 73.825,-26.394
NetE_PAD2_16: E_PAD2.16 J3.1 | length 117.1
  Bottom Layer w0.1: J3.1 29.272,-103.186 13.632,-87.546 13.632,-84.882 68.292,-30.222 70.915,-30.222
  other v1: 75.244,-24.985
NetE_PAD2_17: E_PAD2.17 J4.1 | length 24.5
  Top Layer w0.1: 11.182,-82.302 10.628,-82.857 10.628,-91.821 14.272,-95.465 J4.1
  other v1: 72.428,-19.341
  other v2: 64.437,-28.329
NetE_PAD2_18: E_PAD2.18 J4.2 | length 24.4
  Top Layer w0.1: 11.186,-82.657 10.828,-83.016 10.828,-91.5 15.272,-95.945 J4.2
  other v1: 73.842,-17.927
  other v2: 64.437,-27.611
NetE_PAD2_19: E_PAD2.19 J4.3 | length 24.7
  Top Layer w0.1: 11.478,-82.725 11.028,-83.175 11.028,-91.18 16.272,-96.424 J4.3
  other v1: 75.257,-16.513
  other v2: 64.435,-26.892
NetE_PAD2_20: E_PAD2.20 J4.4 | length 24.8
  Top Layer w0.1: 11.656,-82.906 11.228,-83.334 11.228,-90.86 17.272,-96.904 J4.4
  other v1: 76.74,-15.039
  other v2: 64.437,-26.174
NetE_PAD2_21: E_PAD2.21 J4.5 | length 25.1
  Top Layer w0.1: 11.916,-83.006 11.428,-83.494 11.428,-90.539 18.272,-97.383 J4.5
  other v1: 69.6,-19.341
  other v2: 64.437,-25.455
NetE_PAD2_22: E_PAD2.22 J4.6 | length 25.4
  Top Layer w0.1: 12.197,-83.033 11.628,-83.602 11.628,-90.194 19.272,-97.838 J4.6
  other v1: 71.014,-17.927
  other v2: 64.437,-24.737
NetE_PAD2_23: E_PAD2.23 J4.7 | length 25.8
  Top Layer w0.1: 12.52,-82.993 11.828,-83.685 11.828,-89.835 20.272,-98.279 J4.7
  other v1: 72.428,-16.513
  other v2: 64.437,-24.019
NetE_PAD2_24: E_PAD2.24 J4.8 | length 26.1
  Top Layer w0.1: 12.746,-83.074 12.028,-83.792 12.028,-89.488 21.272,-98.732 J4.8
  other v1: 73.842,-15.098
  other v2: 64.437,-23.3
NetE_PAD2_25: E_PAD2.25 J4.9 | length 25.8
  Top Layer w0.1: 12.608,-83.571 12.228,-83.951 12.228,-89.168 22.272,-99.212 J4.9
  other v1: 80.901,-22.157
  other v2: 72.699,-31.562
NetE_PAD2_26: E_PAD2.26 J4.10 | length 26.5
  Top Layer w0.1: 13.127,-83.358 12.428,-84.057 12.428,-88.87 23.272,-99.714 J4.10
  other v1: 79.486,-23.571
  other v2: 71.98,-31.562
NetE_PAD2_27: E_PAD2.27 J4.11 | length 26.5
  Top Layer w0.1: 13.22,-83.548 12.628,-84.14 12.628,-88.787 24.272,-100.431 J4.11
  other v1: 78.072,-24.985
  other v2: 71.262,-31.562
NetE_PAD2_28: E_PAD2.28 J4.12 | length 26.3
  Top Layer w0.1: 13.105,-83.971 12.828,-84.249 12.828,-88.704 25.272,-101.149 J4.12
  other v1: 76.658,-26.399
  other v2: 70.544,-31.562
NetE_PAD2_29: E_PAD2.29 J4.13 | length 26.5
  Top Layer w0.1: 13.285,-84.151 13.028,-84.408 13.028,-88.621 26.272,-101.866 J4.13
  other v1: 80.96,-19.259
  other v2: 69.825,-31.562
NetE_PAD2_30: E_PAD2.30 J4.14 | length 26.7
  Top Layer w0.1: 13.528,-84.267 13.228,-84.567 13.228,-88.539 27.272,-102.583 J4.14
  other v1: 79.486,-20.742
  other v2: 69.107,-31.564
NetE_PAD2_31: E_PAD2.31 J4.15 | length 26.9
  Top Layer w0.1: 13.771,-84.383 13.428,-84.726 13.428,-88.456 28.272,-103.3 J4.15
  other v1: 78.072,-22.157
  other v2: 68.388,-31.562
NetE_PAD2_32: E_PAD2.32 J4.16 | length 27.2
  Top Layer w0.1: 14.014,-84.499 13.628,-84.886 13.628,-87.923 29.272,-103.567 J4.16
  other v1: 76.658,-23.571
  other v2: 67.67,-31.562
NetE_PAD3_1: E_PAD3.1 J5.16 | length 37.8
  Bottom Layer w0.1: J5.16@-7.373,-115.57 -7.373,-95.257 -1.778,-89.662 -1.778,-80.169 -1.778,-80.128
  other v1: -2.991,6.45
NetE_PAD3_2: E_PAD3.2 J5.15 | length 37.5
  Bottom Layer w0.1: J5.15 -6.429,-94.648 -1.524,-89.743 -1.524,-80.095
  other v1: -2.984,4.45
NetE_PAD3_3: E_PAD3.3 J5.14 | length 37.2
  Bottom Layer w0.1: J5.14 -5.429,-93.931 -1.27,-89.772 -1.27,-80.082 -1.27,-80.069
  other v1: -1.016,14.541
NetE_PAD3_4: E_PAD3.4 J5.13 | length 36.9
  Bottom Layer w0.1: J5.13 -4.429,-93.214 -1.016,-89.801 -1.016,-80.095
  other v1: -0.991,12.45
NetE_PAD3_5: E_PAD3.5 J5.12 | length 36.6
  Bottom Layer w0.1: J5.12 -3.429,-92.496 -0.762,-89.829 -0.762,-80.03
  other v1: -0.991,10.45
NetE_PAD3_6: E_PAD3.6 J5.11 | length 36.3
  Bottom Layer w0.1: J5.11 -2.429,-91.779 -0.547,-89.897 -0.547,-80.082
  other v1: -0.991,8.45
NetE_PAD3_7: E_PAD3.7 J5.10 | length 35.9
  Bottom Layer w0.1: J5.10 -1.429,-91.062 -0.347,-89.98 -0.347,-80.102
  other v1: -0.991,6.45
NetE_PAD3_8: E_PAD3.8 J5.9 | length 113.9
  Bottom Layer w0.1: J5.9 -0.429,-90.345 -0.147,-90.063 -0.147,-1.758
  other v1: -0.991,4.45
NetE_PAD3_9: E_PAD3.9 J5.8 | length 35.7
  Bottom Layer w0.1: 0.147,-80.082 0.147,-89.936 0.571,-90.36 J5.8
  other v1: 0.991,4.45
NetE_PAD3_10: E_PAD3.10 J5.7 | length 36
  Bottom Layer w0.1: 0.347,-80.082 0.347,-89.853 1.571,-91.077 J5.7
  other v1: 0.991,6.45
NetE_PAD3_11: E_PAD3.11 J5.6 | length 36.3
  Bottom Layer w0.1: 0.547,-80.082 0.547,-89.77 2.571,-91.794 J5.6
  other v1: 0.991,8.45
NetE_PAD3_12: E_PAD3.12 J5.5 | length 36.7
  Bottom Layer w0.1: 0.762,-80.01 0.762,-89.702 3.571,-92.511 J5.5
  other v1: 0.991,10.45
NetE_PAD3_13: E_PAD3.13 J5.4 | length 37
  Bottom Layer w0.1: 1.016,-80.082 1.016,-89.674 4.571,-93.229 J5.4
  other v1: 0.991,12.45
NetE_PAD3_14: E_PAD3.14 J5.3 | length 37.3
  Bottom Layer w0.1: 1.27,-80.082 1.27,-89.645 5.571,-93.946 J5.3
  other v1: 1.016,14.541
NetE_PAD3_15: E_PAD3.15 J5.2 | length 37.6
  Bottom Layer w0.1: 1.524,-80.082 1.524,-89.616 6.571,-94.663 J5.2
  other v1: 2.984,4.45
NetE_PAD3_16: E_PAD3.16 J5.1 | length 37.9
  Bottom Layer w0.1: 1.778,-80.082 1.778,-89.535 7.571,-95.328 J5.1
  other v1: 2.991,6.45
NetE_PAD3_17: E_PAD3.17 J6.1 | length 27.2
  Top Layer w0.1: J6.1 -7.429,-95.313 -1.778,-89.662 -1.778,-80.184
  other v1: -2.991,8.45
  other v2: -2.286,-3.556
NetE_PAD3_18: E_PAD3.18 J6.2 | length 27
  Top Layer w0.1: J6.2 -6.429,-94.648 -1.524,-89.743 -1.524,-80.05
  other v1: -2.991,10.45
  other v2: -2.794,-3.048
NetE_PAD3_19: E_PAD3.19 J6.3 | length 26.6
  Top Layer w0.1: J6.3 -5.429,-93.931 -1.27,-89.772 -1.27,-80.127
  other v1: -2.991,12.45
  other v2: -3.303,-2.541
NetE_PAD3_20: E_PAD3.20 J6.4 | length 26.4
  Top Layer w0.1: J6.4 -4.429,-93.214 -1.016,-89.801 -1.016,-80.057
  other v1: -2.984,14.541
  other v2: -3.81,-2.032
NetE_PAD3_21: E_PAD3.21 J6.5 | length 26.1
  Top Layer w0.1: J6.5 -3.429,-92.496 -0.762,-89.829 -0.762,-80.041
  other v1: -4.991,6.45
  other v2: -4.318,-1.524
NetE_PAD3_22: E_PAD3.22 J6.6 | length 25.7
  Top Layer w0.1: J6.6 -2.429,-91.779 -0.544,-89.894 -0.544,-80.082
  other v1: -4.991,8.45
  other v2: -4.826,-1.016
NetE_PAD3_23: E_PAD3.23 J6.7 | length 25.8
  Top Layer w0.1: J6.7 -1.429,-91.062 -0.344,-89.977 -0.344,-80.082 -0.344,-79.645
  other v1: -4.991,10.45
  other v2: -5.334,-0.508
NetE_PAD3_24: E_PAD3.24 J6.8 | length 25.1
  Top Layer w0.1: J6.8 -0.429,-90.345 -0.127,-90.043 -0.127,-80.082
  other v1: -4.991,12.45
  other v2: -5.842,0
NetE_PAD3_25: E_PAD3.25 J6.9 | length 25.1
  Top Layer w0.1: 0.127,-80.082 0.127,-89.916 0.571,-90.36 J6.9
  other v1: 4.991,12.45
  other v2: 5.842,0
NetE_PAD3_26: E_PAD3.26 J6.10 | length 25.5
  Top Layer w0.1: 0.344,-80.082 0.344,-89.85 1.571,-91.077 J6.10
  other v1: 4.991,10.45
  other v2: 5.334,-0.508
NetE_PAD3_27: E_PAD3.27 J6.11 | length 25.8
  Top Layer w0.1: 0.547,-80.082 0.547,-89.77 2.571,-91.794 J6.11
  other v1: 4.991,8.45
  other v2: 4.826,-1.016
NetE_PAD3_28: E_PAD3.28 J6.12 | length 26.2
  Top Layer w0.1: 0.762,-80.01 0.762,-80.082 0.762,-89.702 3.571,-92.511 J6.12
  other v1: 4.991,6.45
  other v2: 4.318,-1.524
NetE_PAD3_29: E_PAD3.29 J6.13 | length 26.4
  Top Layer w0.1: 1.016,-80.082 1.016,-89.674 4.571,-93.229 J6.13
  other v1: 2.984,14.541
  other v2: 3.81,-2.032
NetE_PAD3_30: E_PAD3.30 J6.14 | length 26.7
  Top Layer w0.1: 1.27,-80.082 1.27,-80.137 1.27,-89.645 5.571,-93.946 J6.14
  other v1: 2.991,12.45
  other v2: 3.303,-2.541
NetE_PAD3_31: E_PAD3.31 J6.15 | length 27
  Top Layer w0.1: 1.524,-80.082 1.524,-89.616 6.571,-94.663 J6.15
  other v1: 2.991,10.45
  other v2: 2.794,-3.048
NetE_PAD3_32: E_PAD3.32 J6.16 | length 27.3
  Top Layer w0.1: 1.778,-80.082 1.778,-89.535 7.571,-95.328 J6.16
  other v1: 2.991,8.45
  other v2: 2.286,-3.556
pads on no net: J1.17 J1.18 J2.17 J2.18 J3.17 J3.18 J4.17 J4.18 J5.17 J5.18 J6.17 J6.18

## Silkscreen, mask and mechanical layers (free items; w line width, h text height)
Mechanical 13:
  the board outline again, w0.3